# Altium PCB board.PcbDoc
Units mm, origin at the board's own origin, x right, y up, seen from the top; angles counter-clockwise.
Board outline 68.5 x 46.5 mm, 2 copper layers (Sig, GND), stack 1.671 mm thick; 46 components, 43 nets, 174 pads, 55 vias.
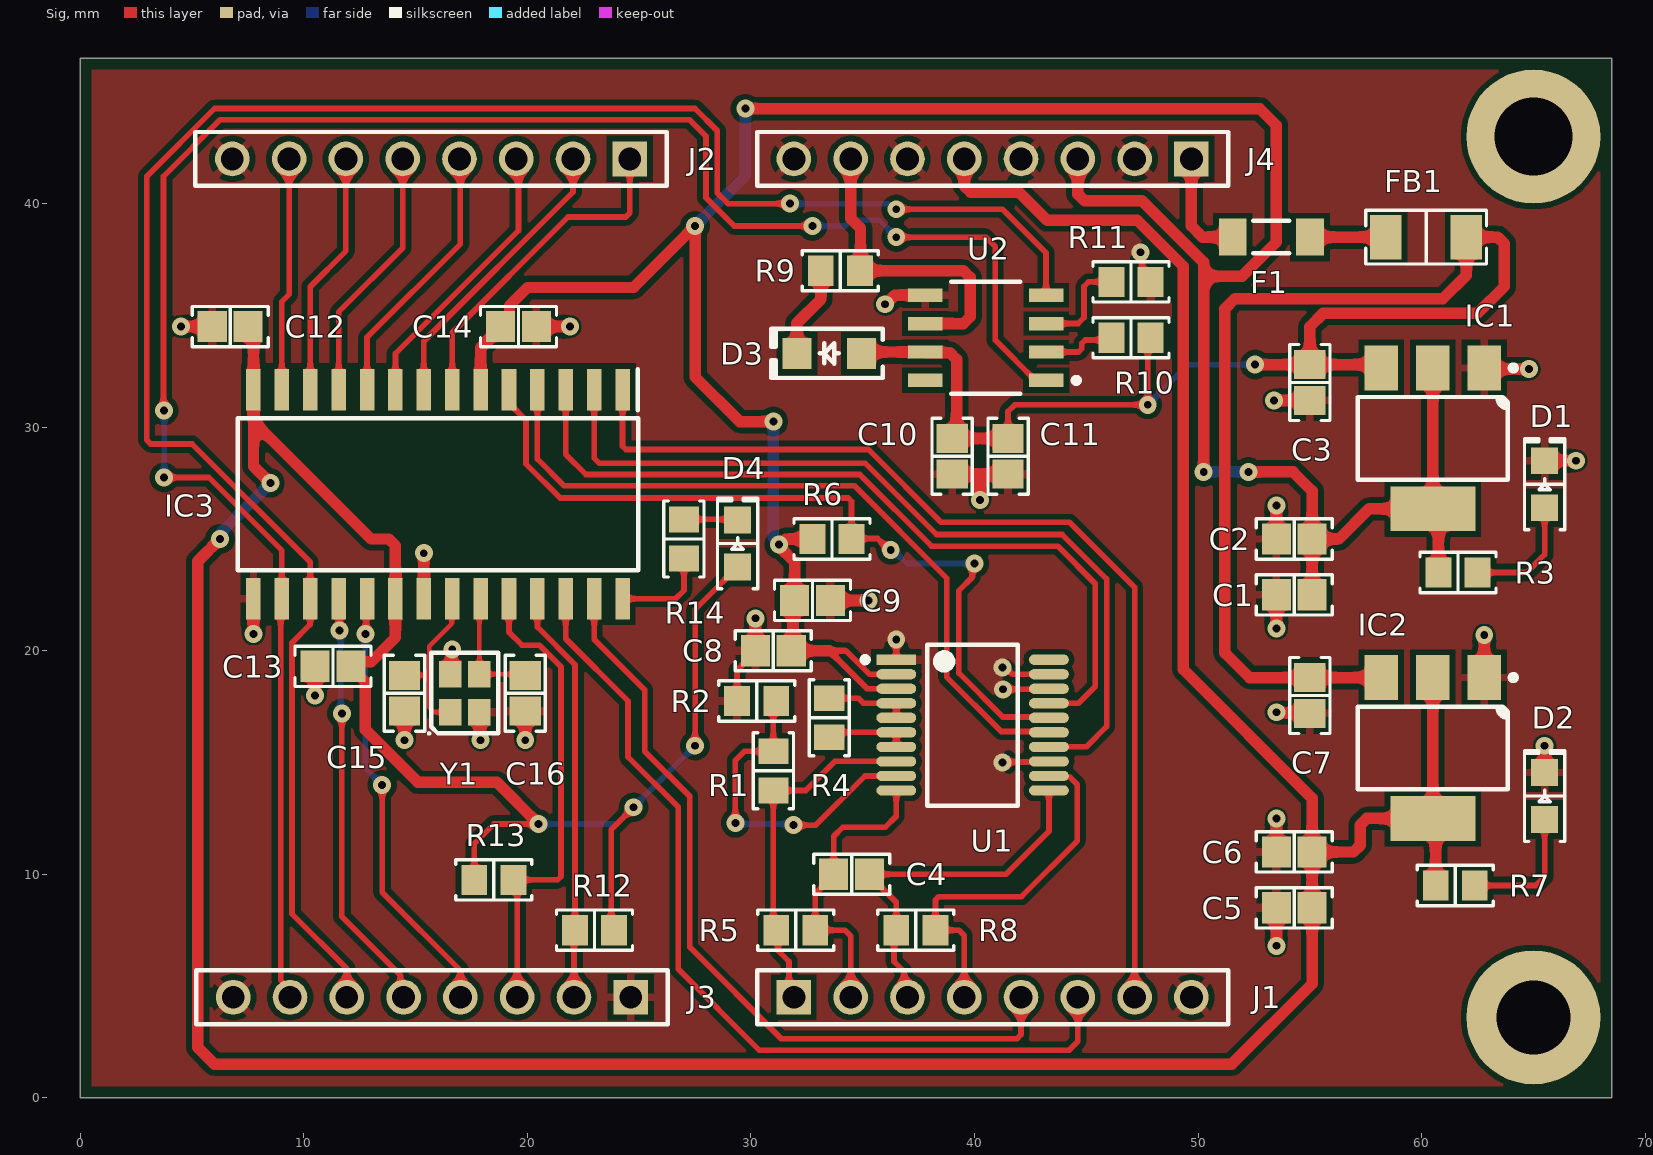
[diagram p0: Sig view]
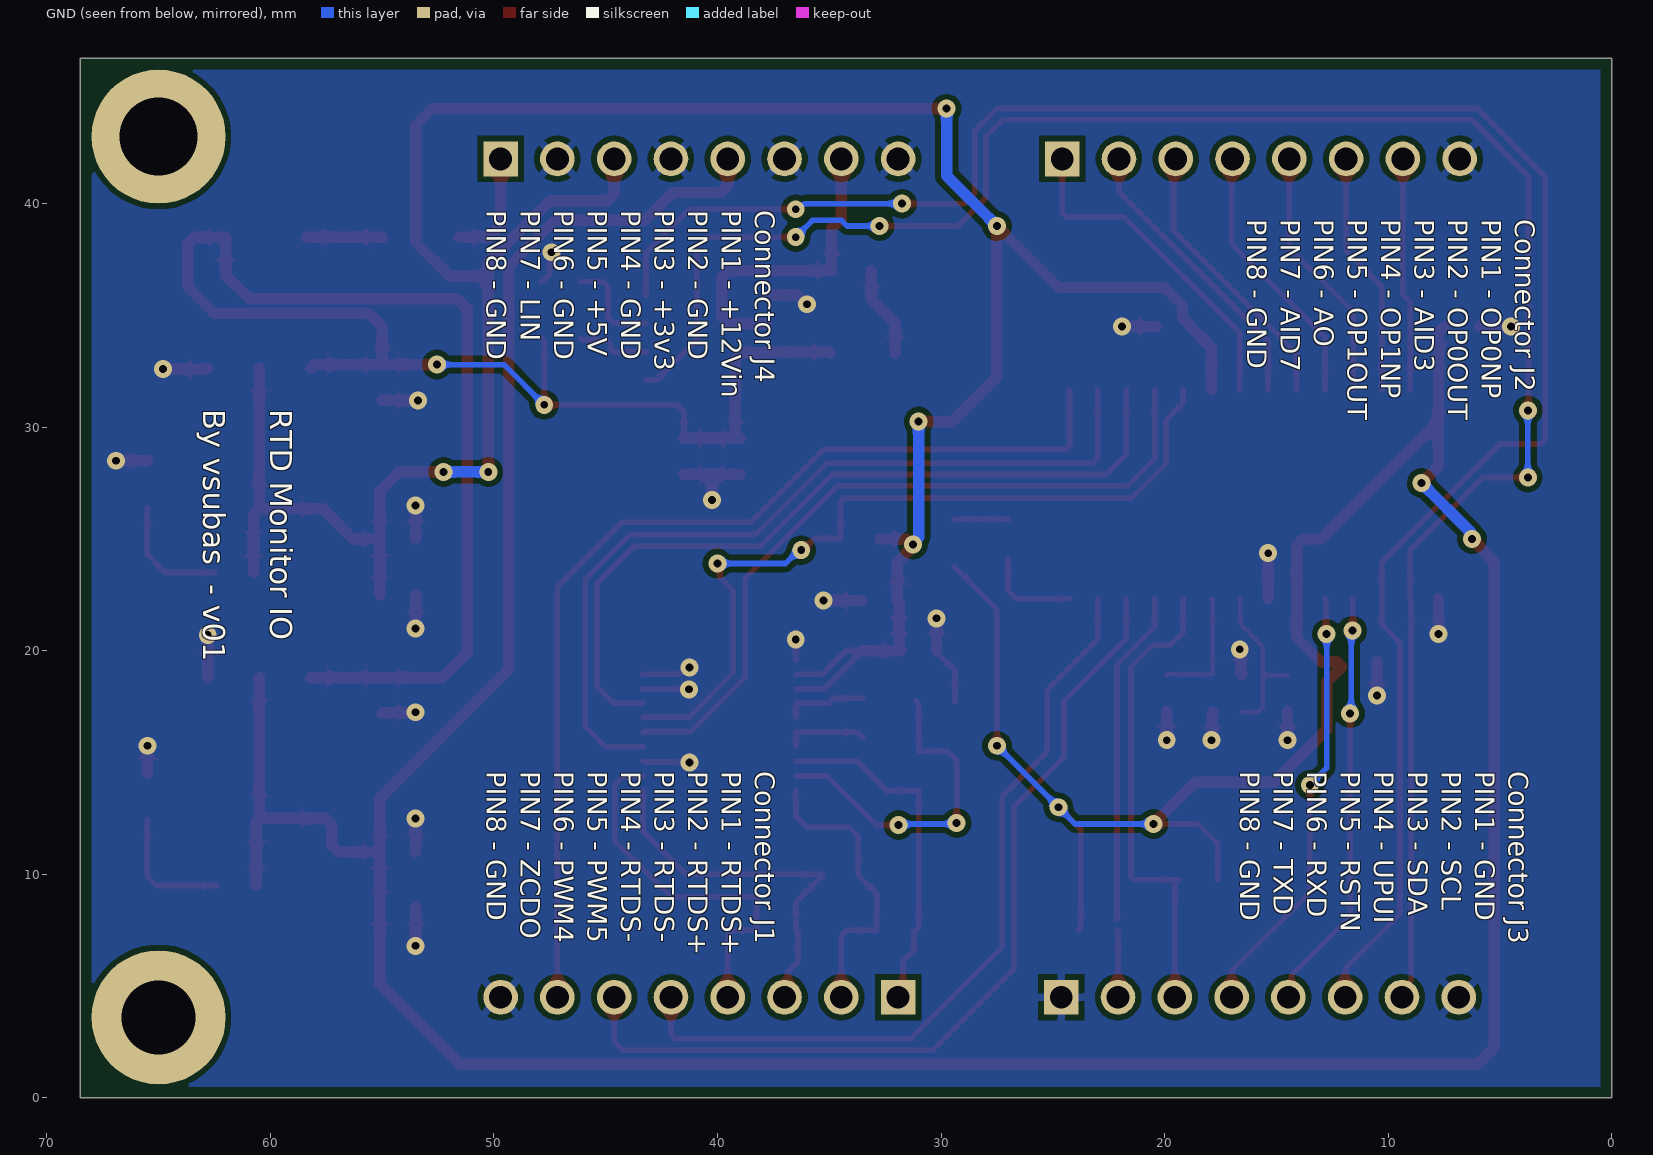
[diagram p1: GND view, seen from below]
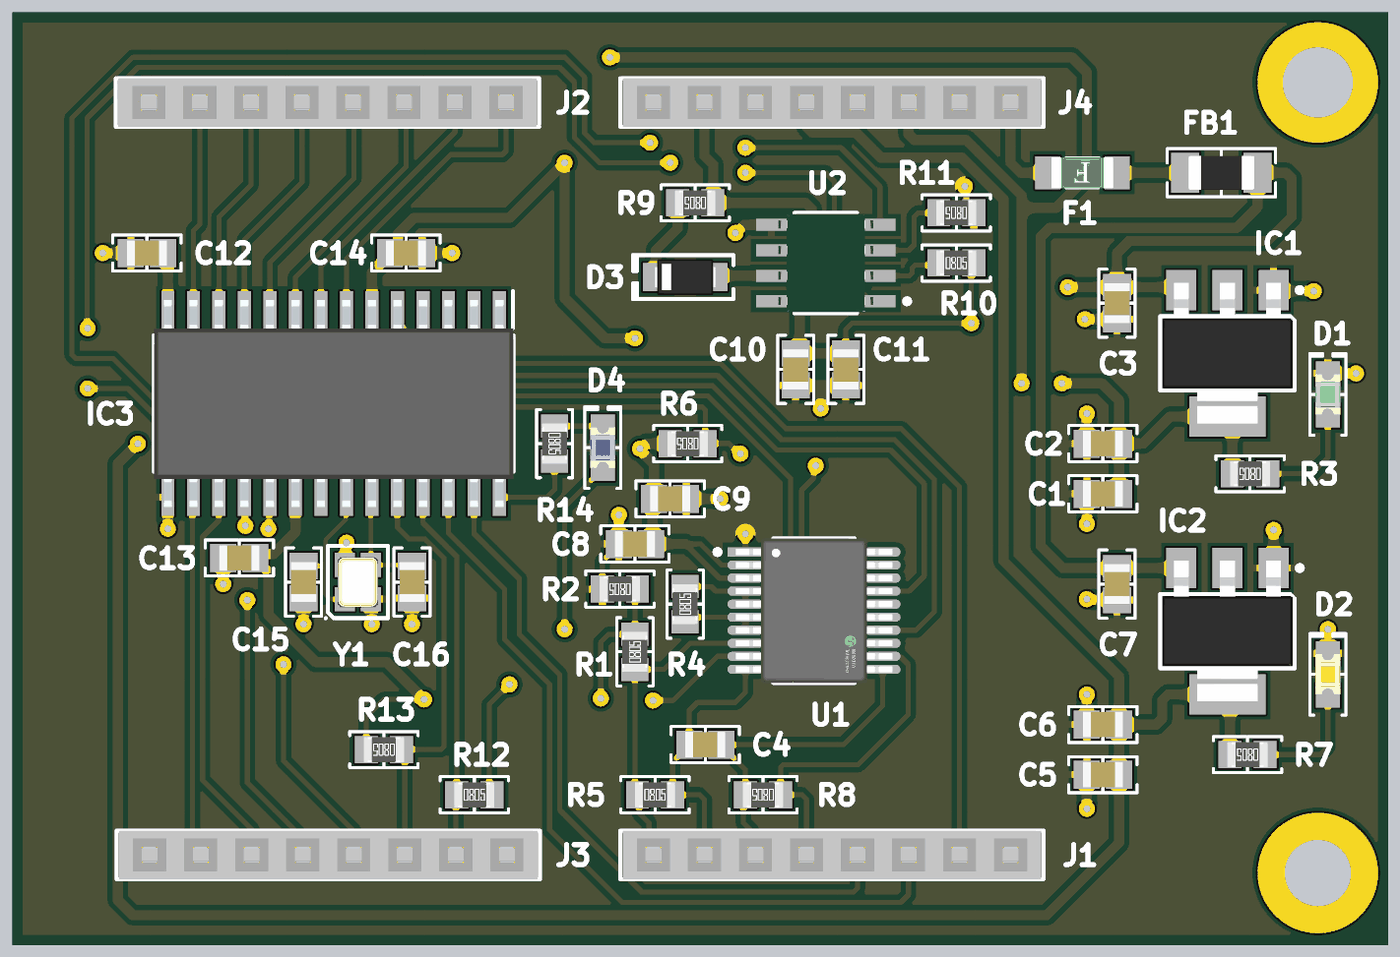
[diagram p2: 3D render of the assembled board from above, using the file's embedded part models]

## Layer stack, top to bottom
Top Solder: solder mask 0.0102, Solder Resist, Dk 3.5
Sig: signal copper 0.0356
Dielectric 1: dielectric 1.6, FR-4, Dk 4.8
GND: signal copper 0.0356
Bottom Solder: solder mask 0.0102, Solder Resist, Dk 3.5

## Board outline
0,0 0,46.5 68.5,46.5 68.5,0

## Design rules (kind name [scope] priority, off if disabled: settings)
BoardOutlineClearance [All] p1: gap=0.5 ignorepadtopadclearanceinfootprint=FALSE
Clearance [All] p1: gap=0.254 ignorepadtopadclearanceinfootprint=TRUE
HoleSize [All] p1: absolutevalues=TRUE maxlimit=5 minlimit=0.025 maxpercent=80.000 minpercent=20.000
MinimumSolderMaskSliver [All] p1: minsoldermaskwidth=0.01
PlaneConnect [All] p1: pad.planeconnectstyle=Relief pad.reliefexpansion=0.508 pad.reliefentries=4 pad.reliefconductorwidth=0.35 pad.reliefairgap=0.254 via.planeconnectstyle=Direct via.reliefexpansion=0.508 via.reliefentries=4 via.reliefconductorwidth=0.254 via.reliefairgap=0.254
PolygonConnect [All] p1: thpad.connectstyle=Relief thpad.reliefconductorwidth=0.35 thpad.reliefentries=4 thpad.polygonreliefangle="90 Angle" thpad.airgapwidth=0.254 thpad.conductorbypadedge=TRUE thpad.mindistance=0.381 thpad.enablemindistance=FALSE smdpad.connectstyle=Relief smdpad.reliefconductorwidth=0.35 smdpad.reliefentries=4 smdpad.polygonreliefangle="90 Angle" smdpad.airgapwidth=0.254 smdpad.conductorbypadedge=TRUE smdpad.mindistance=0.381 smdpad.enablemindistance=FALSE via.connectstyle=Direct via.reliefconductorwidth=0.254 via.reliefentries=4 via.polygonreliefangle="90 Angle" via.airgapwidth=0.254
RoutingVias [All] p1: holewidth=0.35 width=0.8 viastyle="Through Hole" minholewidth=0.35 minwidth=0.8 maxholewidth=0.35 maxwidth=0.8
SilkToSilkClearance [All] p1: silktosilkclearance=0.01
SilkToSolderMaskClearance [IsPad] p1: minsilkscreentomaskgap=0.01 clearancetoexposedcopper=TRUE
SolderMaskExpansion [All] p1: expansion=0.102 istentingtop=FALSE
Width [All] p1: maxlimit=0.508 minlimit=0.203 preferedwidth=0.254
25 further rules are at their usual default settings.

## Components (designator, comment, footprint, x,y, rotation, side; value= is the part's Value field where it differs from the comment)
C1 "0.1µF" "CAP 0805_2012" 54.3,22.5 r0 top
C2 "4.7µF" "CAP 0805_2012" 54.3,25 r0 top
C3 "2.2µF" "CAP 0805_2012" 55,32 r90 top
C4 "0.1µF" "CAP 0805_2012" 34.5,10 r0 top
C5 "0.1µF" "CAP 0805_2012" 54.3,8.5 r0 top
C6 "4.7µF" "CAP 0805_2012" 54.3,11 r0 top
C7 "2.2µF" "CAP 0805_2012" 55,18 r90 top
C8 "0.1µF" "CAP 0805_2012" 31,20 r0 top
C9 "0.1µF" "CAP 0805_2012" 32.75,22.25 r180 top
C10 "0.1µF" "CAP 0805_2012" 39,28.7 r90 top
C11 "2.2µF" "CAP 0805_2012" 41.5,28.7 r90 top
C12 "0.1µF" "CAP 0805_2012" 6.7,34.5 r0 top
C13 "0.1µF" "CAP 0805_2012" 11.3,19.3 r0 top
C14 "0.1µF" "CAP 0805_2012" 19.6,34.5 r180 top
C15 "15pF" "CAP 0805_2012" 14.5,18.1 r90 top
C16 "15pF" "CAP 0805_2012" 19.9,18.1 r90 top
D1 "Green" "LED 0805_2012 GREEN" 65.5,27.45 r90 top
D2 "Yellow" "LED 0805_2012 YELLOW" 65.5,13.5 r90 top
D3 "RSFAL R3G" "SMF DO-219AB" 33.5,33.3 r180 top
D4 "Blue" "LED 0805_2012 BLUE" 29.4,24.8 r90 top
F1 "MFU1206FF01250P100" "FUSE 1206_3216 0.6MM" 53.275,38.5 r180 top
FB1 "50 Ohms @ 100 MHz" "FER 1206_3216" 60.2,38.5 r180 top
IC1 "LD1117S33TR" "ST SOT-223" 60.5,29.5 r270 top
IC2 "LD1117S50TR" "ST SOT-223" 60.5,15.65 r270 top
IC3 "AVR128DB28-E_SO" SOIC127P1030X265-28N 16,27 r270 top
J1 "SSQ-108-01-F-S" SMTC-SSQ-108-01-X-S 31.92,4.5 r0 top
J2 "SSQ-108-01-F-S" SMTC-SSQ-108-01-X-S 24.58,42 r180 top
J3 "SSQ-108-01-F-S" SMTC-SSQ-108-01-X-S 24.62,4.5 r180 top
J4 "SSQ-108-01-F-S" SMTC-SSQ-108-01-X-S 49.7,42 r180 top
R1 "100M" "RES 0805_2012" 31,14.625 r90 top
R2 "0R" "RES 0805_2012" 30.25,17.75 r180 top
R3 "330R" "RES 0805_2012" 61.625,23.5 r180 top
R4 "470R" "RES 0805_2012" 33.5,17 r90 top
R5 "0R" "RES 0805_2012" 32,7.5 r0 top
R6 "10k" "RES 0805_2012" 33.625,25 r180 top
R7 "510R" "RES 0805_2012" 61.5,9.5 r180 top
R8 "0R" "RES 0805_2012" 37.375,7.5 r180 top
R9 "1k" "RES 0805_2012" 34,37 r180 top
R10 "10k" "RES 0805_2012" 47,34 r0 top
R11 "10k" "RES 0805_2012" 47,36.5 r180 top
R12 "1k" "RES 0805_2012" 23,7.5 r0 top
R13 "1k" "RES 0805_2012" 18.5,9.75 r180 top
R14 "510R" "RES 0805_2012" 27,25 r270 top
U1 "MAX31865AAP+" FP-A20-1-IPC_B 39.914,16.675 r0 top
U2 "MCP2003B-E/SN" FP-C04-057-MFG 40.5,34 r180 top
Y1 "16 MHz" "NDK NX2520SA" 17.2,18.1 r90 top

## Footprints (in the part's own frame and the unit in brackets; to place one, negate y for a bottom-side part, rotate by r counter-clockwise, add the part's x,y. Pads: shape width x height; smd on the part's side, far side on the other; paste and mask are expansions set on the pad)
"CAP 0805_2012" [mm] "Chip Capacitor, 2-Leads, Body 2.00x1.20mm, IPC Medium Density"
  rect 1.3x1.4 smd: 1(-0.8,0) 2(0.8,0)
  silkscreen extent -1.7,-0.9 1.7,0.9, body extent -1,-0.64 1,0.64, height 1.26
"FER 1206_3216" [mm] "Chip Ferrite, 2-Leads, Body 3.20x1.60mm, IPC Medium Density"
  rect 1.4x2 smd: 1(-1.8,0) 2(1.8,0)
  silkscreen extent -2.7,-1.2 2.7,1.2, body extent -1.65,-0.85 1.65,0.85, height 1.3
FP-A20-1-IPC_B [mm]
  rect 1.782x0.458 smd paste+0 mask+0: 1(-3.414,2.925)
  rrect100% 1.782x0.458 smd paste+0 mask+0: 2(-3.414,2.275) 3(-3.414,1.625) 4(-3.414,0.975) 5(-3.414,0.325) 6(-3.414,-0.325) 7(-3.414,-0.975) 8(-3.414,-1.625) 9(-3.414,-2.275) 10(-3.414,-2.925) 11(3.414,-2.925) 12(3.414,-2.275) 13(3.414,-1.625) 14(3.414,-0.975) 15(3.414,-0.325) 16(3.414,0.325) 17(3.414,0.975) 18(3.414,1.625) 19(3.414,2.275) 20(3.414,2.925)
  silkscreen extent -4.93,-3.6 2.02,3.6, body extent -4.55,-3.85 4.55,3.85, height 0.25
FP-C04-057-MFG [mm]
  rect 1.55x0.6 smd paste+0 mask+0: 1(-2.7,1.905) 2(-2.7,0.635) 3(-2.7,-0.635) 4(-2.7,-1.905) 5(2.7,-1.905) 6(2.7,-0.635) 7(2.7,0.635) 8(2.7,1.905)
  silkscreen extent -4.18,-2.5 1.55,2.5, body extent -3.57,-2.75 3.57,2.75, height 0.25
"FUSE 1206_3216 0.6MM" [mm] "Chip Fuse 1.5A AC 63V DC, 2-Leads, Body 3.10x1.55mm, IPC Medium Densitym"
  rect 1.25x1.65 smd: 1(-1.725,0) 2(1.725,0)
  silkscreen extent -0.8,-0.72 0.8,0.72, body extent -1.55,-0.77 1.55,0.78, height 0.76
"LED 0805_2012 BLUE" [mm] "Chip Diode, 2-Leads, Body 2.00x1.25mm, IPC Medium Density"
  rect 1.2x1.2 smd: 1(-1.05,0) 2(1.05,0)
  silkscreen extent -2.03,-0.9 2.03,0.9, body extent -1,-0.62 1,0.63, height 0.9
"LED 0805_2012 GREEN" [mm] "Chip Diode, 2-Leads, Body 2.00x1.25mm, IPC Medium Density"
  rect 1.2x1.2 smd: 1(-1.05,0) 2(1.05,0)
  silkscreen extent -2.03,-0.9 2.03,0.9, body extent -1,-0.62 1,0.63, height 0.9
"LED 0805_2012 YELLOW" [mm] "Chip Diode, 2-Leads, Body 2.00x1.25mm, IPC Medium Density"
  rect 1.2x1.2 smd: 1(-1.05,0) 2(1.05,0)
  silkscreen extent -2.03,-0.9 2.03,0.9, body extent -1,-0.62 1,0.63, height 0.9
"NDK NX2520SA" [mm] "Crystal, 4-Leads, Body 2.00x2.50mm, Pitch 1.70mm, IPC Medium Density"
  rect 1.2x1 smd: 1(-0.85,0.65) 2(-0.85,-0.65) 3(0.85,-0.65) 4(0.85,0.65)
  silkscreen extent -1.85,-1.5 1.8,1.65, body extent -1.26,-1.01 1.26,1.01, height 0.5
"RES 0805_2012" [mm] "Chip Resistor, 2-Leads, Body 2.00x1.25mm, IPC Medium Density"
  rect 1.15x1.35 smd: 1(-0.875,0) 2(0.875,0)
  silkscreen extent -1.7,-0.9 1.7,0.9, body extent -1,-0.62 1,0.63, height 0.6
"SMF DO-219AB" [mm] "Molded Diode, 2-Leads, Body 3.90x1.90mm, IPC Medium Density"
  rect 1.3x1.4 smd: 1(-1.45,0) 2(1.45,0)
  silkscreen extent -2.4,-1.1 2.59,1.1, body extent -1.5,-0.9 1.5,0.9, height 1.18
SMTC-SSQ-108-01-X-S [mm] "SQ Post Socket, 1x8 Pins, Vertical, 2.54mm Pitch, Female"
  rect 1.55x1.55 hole 1.02: 1(0,0)
  round 1.55 hole 1.02: 2(2.54,0) 3(5.08,0) 4(7.62,0) 5(10.16,0) 6(12.7,0) 7(15.24,0) 8(17.78,0)
  silkscreen extent -1.65,-1.2 19.43,1.2, body extent -1.52,-1.21 19.3,1.21, height 8.51
SOIC127P1030X265-28N [mm]
  rect 1.85x0.65 smd: 1(-4.675,8.255) 2(-4.675,6.985) 3(-4.675,5.715) 4(-4.675,4.445) 5(-4.675,3.175) 6(-4.675,1.905) 7(-4.675,0.635) 8(-4.675,-0.635) 9(-4.675,-1.905) 10(-4.675,-3.175) 11(-4.675,-4.445) 12(-4.675,-5.715) 13(-4.675,-6.985) 14(-4.675,-8.255) 15(4.675,-8.255) 16(4.675,-6.985) 17(4.675,-5.715) 18(4.675,-4.445) 19(4.675,-3.175) 20(4.675,-1.905) 21(4.675,-0.635) 22(4.675,0.635) 23(4.675,1.905) 24(4.675,3.175) 25(4.675,4.445) 26(4.675,5.715) 27(4.675,6.985) 28(4.675,8.255)
  silkscreen extent -5.6,-8.95 3.4,8.95, body extent -5.15,-8.95 5.15,8.95, height 2.65
"ST SOT-223" [mm] "SOT223, 4-Leads, Body 6.50x7.00mm (avg), Pitch 2.30mm, IPC Medium Density"
  rect 2x1.5 smd: 1(-3.15,2.3) 2(-3.15,0) 3(-3.15,-2.3)
  rect 2x3.8 smd: 4(3.15,0)
  silkscreen extent -3.27,-3.35 1.85,3.73, body extent -3.52,-3.25 3.5,3.25, height 1.8

## Part data
C1 C4 C5 C8 C9 C10 C12 C13 C14: library part 08053C104JAT4A, "CAP CER 0.1UF 25V X7R 0805", Device Package="0805 (2012 Metric)", manufacturer="AVX Corporation", Operating Temperature="-55°C ~ 125°C", Supplier Part Number 1=478-13051-1-ND, Temperature Coefficient=X7R, Tolerance=±5%, Voltage - Rated=25V, Applications="General Purpose", Capacitance=0.1µF, componentlink1description=Datasheet, componentlink1url=http://datasheets.avx.com/X7RDielectric.pdf, componentlink2description="DigiKey Link", componentlink2url=http://digikey.com/product-detail/en/avx-corporation/08053C104JAT4A/478-13051-1-ND/9948569, lastupdated="2/09/2020 1:04:39 AM", Lifecycle Status=Active, Minimum Order=1, Mounting Type="Surface Mount, MLCC", Package / Case="0805 (2012 Metric)", packaging=TapeAndReel, Part Number=08053C104JAT4A, Part Status=Active, partid=3721, price=0.04, series=-, Size / Dimension="0.079\" L x 0.049\" W (2.01mm x 1.25mm)", Supplier 1=DigiKey, Thickness (Max)="0.037\" (0.94mm)"
C2 C6: library part CL21A475KBQNNNE, "CAP CER 4.7UF 50V X5R 0805", Device Package="0805 (2012 Metric)", manufacturer="Samsung Electro-Mechanics", Operating Temperature="-55°C ~ 85°C", Supplier Part Number 1=1276-1248-1-ND, Temperature Coefficient=X5R, Tolerance=±10%, Voltage - Rated=50V, Applications="General Purpose", Capacitance=4.7µF, componentlink1description=Datasheet, componentlink1url=http://www.samsungsem.com/kr/support/product-search/mlcc/CL21A475KBQNNNE.jsp, componentlink2description="DigiKey Link", componentlink2url=https://www.digikey.com/en/products/detail/samsung-electro-mechanics/CL21A475KBQNNNE/3886906, lastupdated="21/03/2023 7:12:38 PM", Lifecycle Status=Active, Minimum Order=1, Mounting Type="Surface Mount, MLCC", Package / Case="0805 (2012 Metric)", packaging=TapeAndReel, Part Number=CL21A475KBQNNNE, Part Status=Active, partid=3027, price=0.03, series=CL, Size / Dimension="0.079\" L x 0.049\" W (2.00mm x 1.25mm)", Supplier 1=DigiKey, Thickness (Max)="0.055\" (1.40mm)"
C3 C7 C11: library part CL21A225KB9LNNC, "CAP CER 2.2UF 50V X5R 0805", Device Package="0805 (2012 Metric)", manufacturer="Samsung Electro-Mechanics", Operating Temperature="-55°C ~ 85°C", Supplier Part Number 1=1276-2409-1-ND, Temperature Coefficient=X5R, Tolerance=±10%, Voltage - Rated=50V, Applications="General Purpose", Capacitance=2.2µF, componentlink1description=Datasheet, componentlink1url=http://www.samsungsem.com/kr/support/product-search/mlcc/CL21A225KB9LNNC.jsp, componentlink2description="DigiKey Link", componentlink2url=https://www.digikey.com/en/products/detail/samsung-electro-mechanics/CL21A225KB9LNNC/3888067, Features="Low Profile", lastupdated="21/03/2023 7:12:38 PM", Lifecycle Status=Active, Minimum Order=1, Mounting Type="Surface Mount, MLCC", Package / Case="0805 (2012 Metric)", packaging=TapeAndReel, Part Number=CL21A225KB9LNNC, Part Status=Active, partid=3097, price=0.04, series=CL, Size / Dimension="0.079\" L x 0.049\" W (2.00mm x 1.25mm)", Supplier 1=DigiKey, Thickness (Max)="0.039\" (1.00mm)"
C15 C16: library part 08055A150GAT2A, "CAP CER 15PF 50V NP0 0805", Device Package="0805 (2012 Metric)", manufacturer="AVX Corporation", Operating Temperature="-55°C ~ 125°C", Supplier Part Number 1=478-11884-1-ND, Temperature Coefficient="C0G, NP0", Tolerance=±2%, Voltage - Rated=50V, Applications="General Purpose", Capacitance=15pF, componentlink1description=Datasheet, componentlink1url=http://datasheets.avx.com/C0GNP0-Dielectric.pdf, componentlink2description="DigiKey Link", componentlink2url=http://digikey.com/product-detail/en/avx-corporation/08055A150GAT2A/478-11884-1-ND/8573520, lastupdated="2/09/2020 1:04:39 AM", Lifecycle Status=Active, Minimum Order=1, Mounting Type="Surface Mount, MLCC", Package / Case="0805 (2012 Metric)", packaging=TapeAndReel, Part Number=08055A150GAT2A, Part Status=Active, partid=3968, price=0.10, series=-, Size / Dimension="0.079\" L x 0.049\" W (2.01mm x 1.25mm)", Supplier 1=DigiKey, Thickness (Max)="0.037\" (0.94mm)"
D1: library part QTLP630C4TR, "LED GREEN CLEAR 0805 SMD", Current - Test=20mA, Device Package="0805 (2012 Metric)", Lens Color=Colorless, manufacturer="Everlight Electronics Co Ltd", Millicandela Rating=10mcd, Supplier Device Package=0805, Supplier Part Number 1=1080-1411-1-ND, Voltage - Forward (Vf) (Typ)=2.1V, Color=Green, componentlink1description=Datasheet, componentlink1url=//media.digikey.com/PDF/Data%20Sheets/Everlight%20PDFs/QTLP630-2.pdf, componentlink2description="DigiKey Link", componentlink2url=https://www.digikey.com/en/products/detail/everlight-electronics-co-ltd/QTLP630C4TR/2675902, Configuration=Standard, Height (Max)=1.20mm, lastupdated="7/04/2023 8:00:35 PM", Lens Size="1.40mm x 1.25mm", Lens Style="Rectangle with Flat Top", Lens Transparency=Clear, Lifecycle Status=Active, Minimum Order=1, Mounting Type="Surface Mount", Package / Case="0805 (2012 Metric)", packaging=TapeAndReel, Part Number=QTLP630C4TR, Part Status=Active, partid=240, price=0.04, series=-, Size / Dimension="2.00mm L x 1.25mm W", Supplier 1=DigiKey, Viewing Angle=140°, Wavelength - Dominant=570nm, Wavelength - Peak=565nm
D2: library part VAOL-S8YP4, "LED YELLOW CLEAR 0805 SMD", Current - Test=20mA, Device Package="0805 (2012 Metric)", Lens Color=Colorless, manufacturer="Visual Communications Company - VCC", Millicandela Rating=92mcd, Supplier Device Package=0805, Supplier Part Number 1=VAOL-S8YP4CT-ND, Voltage - Forward (Vf) (Typ)=2V, Color=Yellow, componentlink1description=Datasheet, componentlink1url=http://vcclite.com/_pdf/VAOL-S8YP4-LED-0805-yellow.pdf, componentlink2description="DigiKey Link", componentlink2url=http://digikey.com/product-detail/en/visual-communications-company-vcc/VAOL-S8YP4/VAOL-S8YP4CT-ND/5176155, Configuration=Standard, Height (Max)=1.30mm, lastupdated="21/03/2023 8:00:35 PM", Lens Size="1.40mm x 1.25mm", Lens Style="Rectangle with Flat Top", Lens Transparency=Clear, Lifecycle Status=Active, Minimum Order=1, Mounting Type="Surface Mount", Package / Case="0805 (2012 Metric)", packaging=TapeAndReel, Part Number=VAOL-S8YP4, Part Status=Active, partid=40, price=0.08, series=-, Size / Dimension="2.00mm L x 1.25mm W", Supplier 1=DigiKey, Viewing Angle=140°, Wavelength - Dominant=589nm, Wavelength - Peak=591nm
D3: "DIODE GEN PURP 50V 500MA SUB SMA", Capacitance @ Vr, F="4pF @ 4V, 1MHz", Current - Average Rectified (Io)=500mA, Current - Reverse Leakage @ Vr="5µA @ 50V", manufacturer="Taiwan Semiconductor Corporation", Operating Temperature - Junction="-55°C ~ 150°C", Package / Case=DO-219AB, Supplier Device Package="Sub SMA", Supplier Part Number 1=RSFALR3GCT-ND, Voltage - DC Reverse (Vr) (Max)=50V, Voltage - Forward (Vf) (Max) @ If="1.3V @ 500mA", componentlink1description=Datasheet, componentlink1url=https://www.taiwansemi.com/products/datasheet/RSFAL%20SERIES_L15.pdf, componentlink2description="DigiKey Link", componentlink2url=http://digikey.com/product-detail/en/taiwan-semiconductor-corporation/RSFAL-R3G/RSFALR3GCT-ND/7358188, Diode Type=Standard, lastupdated="11/04/2023 8:03:34 PM", Lifecycle Status=Active, Minimum Order=1, Mounting Type="Surface Mount", packaging=TapeAndReel, Part Number="RSFAL R3G", Part Status=Active, partid=1240, price=0.07, Reverse Recovery Time (trr)=150ns, series=-, Speed="Fast Recovery =< 500ns, > 200mA (Io)", Supplier 1=DigiKey
D4: library part 5973605607F, "LED BLUE 0805 SMD", Current - Test=2mA, Device Package="0805 (2012 Metric)", Lens Color=0.93mm, manufacturer=Dialight, Millicandela Rating=15mcd, Supplier Device Package=0805, Supplier Part Number 1=350-4394-1-ND, Voltage - Forward (Vf) (Typ)=2.8V, Color=Blue, componentlink1description=Datasheet, componentlink1url=http://www.dialightsignalsandcomponents.com/Assets/Drawings/2D_Drawings_DrawingDetailedSpec/NewDrawings/18375A.pdf, componentlink2description="DigiKey Link", componentlink2url=https://www.digikey.com/en/products/detail/dialight/5973605607F/9385449, Configuration=Standard, Height (Max)=1.10mm, lastupdated="8/04/2023 8:00:14 PM", Lens Size="1.40mm x 1.25mm", Lens Style="Rectangle with Flat Top", Lifecycle Status=Active, Minimum Order=1, Mounting Type="Surface Mount", Package / Case="0805 (2012 Metric)", packaging=TapeAndReel, Part Number=5973605607F, Part Status=Active, partid=760, price=0.08, series=597, Size / Dimension="2.00mm L x 1.25mm W", Supplier 1=DigiKey, Viewing Angle=130°, Wavelength - Peak=468nm
F1: "FUSE BOARD MNT 1.25A 63VDC 1206", Breaking Capacity @ Rated Voltage=50A, Current Rating (Amps)=1.25A, Device Package="1206 (3216 Metric)", manufacturer="Vishay Beyschlag", Operating Temperature="-55°C ~ 125°C", Supplier Part Number 1=MFU12061.25CT-ND, Voltage Rating - DC=63V, Approval Agency=UL, Approvals=UL, componentlink1description=Datasheet, componentlink1url=http://www.vishay.com/docs/28747/mfuserie.pdf, componentlink2description="DigiKey Link", componentlink2url=http://digikey.com/product-detail/en/vishay-beyschlag/MFU1206FF01250P100/MFU12061.25CT-ND/1206562, Fuse Type="Board Mount (Cartridge Style Excluded)", lastupdated="2/09/2020 1:30:46 AM", Lifecycle Status=Active, Melting I²t=0.0041, Minimum Order=1, Mounting Type="Surface Mount", Package / Case="1206 (3216 Metric)", packaging=TapeAndReel, Part Number=MFU1206FF01250P100, Part Status=Active, price=0.30, Response Time="Fast Blow", series=MFU, Size / Dimension="0.126\" L x 0.063\" W x 0.022\" H (3.20mm x 1.60mm x 0.55mm)", Supplier 1=DigiKey
FB1: library part MFBW1V3216-500-R, "FERRITE BEAD 50 OHM 1206 1LN", Current Rating (Max)=3A, DC Resistance (DCR) (Max)=70mOhm, Device Package="1206 (3216 Metric)", manufacturer="Eaton - Electronics Division", Operating Temperature="-40°C ~ 85°C", Supplier Part Number 1=283-MFBW1V3216-500-RCT-ND, componentlink1description=Datasheet, componentlink1url=https://www.eaton.com/content/dam/eaton/products/electronic-components/resources/data-sheet/eaton-mfbw1v3216-high-impedance-multilayer-ferrite-chip-bead-data-sheet.pdf, componentlink2description="DigiKey Link", componentlink2url=https://www.digikey.com/en/products/detail/eaton-electronics-division/MFBW1V3216-500-R/13161315, Height (Max)="0.043\" (1.10mm)", Impedance @ Frequency="50 Ohms @ 100 MHz", lastupdated="7/04/2023 7:54:11 PM", Lifecycle Status=Active, Minimum Order=1, Mounting Type="Surface Mount", Number of Lines=1, Package / Case="1206 (3216 Metric)", packaging=TapeAndReel, Part Number=MFBW1V3216-500-R, Part Status=Active, partid=3259, price=0.03, series=MFBW1V3216, Size / Dimension="0.126\" L x 0.063\" W (3.20mm x 1.60mm)", Supplier 1=DigiKey
IC1: "IC REG LINEAR 3.3V 800MA SOT223", Current - Output=800mA, Current - Quiescent (Iq)="10 mA", manufacturer=STMicroelectronics, Operating Temperature="0°C ~ 125°C", Package / Case="TO-261-4, TO-261AA", Supplier Device Package=SOT-223, Supplier Part Number 1=497-1242-1-ND, Voltage - Input (Max)=15V, Voltage - Output (Min/Fixed)=3.3V, Voltage Dropout (Max)="1.2V @ 800mA", componentlink1description=Datasheet, componentlink1url=http://www.st.com/content/ccc/resource/technical/document/datasheet/99/3b/7d/91/91/51/4b/be/CD00000544.pdf/files/CD00000544.pdf/jcr:content/translations/en.CD00000544.pdf, componentlink2description="DigiKey Link", componentlink2url=https://www.digikey.com/en/products/detail/stmicroelectronics/LD1117S33TR/585766, lastupdated="7/04/2023 8:08:42 PM", Lifecycle Status=Active, Minimum Order=1, Mounting Type="Surface Mount", Number of Regulators=1, Output Configuration=Positive, Output Type=Fixed, packaging=TapeAndReel, Part Number=LD1117S33TR, Part Status=Active, price=0.21, Protection Features="Over Current, Over Temperature", PSRR="75dB (120Hz)", series=-, Supplier 1=DigiKey
IC2: "IC REG LINEAR 5V 800MA SOT223", Current - Output=800mA, Current - Quiescent (Iq)="10 mA", manufacturer=STMicroelectronics, Operating Temperature="0°C ~ 125°C", Package / Case="TO-261-4, TO-261AA", Supplier Device Package=SOT-223, Supplier Part Number 1=497-6447-1-ND, Voltage - Input (Max)=15V, Voltage - Output (Min/Fixed)=5V, Voltage Dropout (Max)="1.2V @ 800mA", componentlink1description=Datasheet, componentlink1url=http://www.st.com/content/ccc/resource/technical/document/datasheet/99/3b/7d/91/91/51/4b/be/CD00000544.pdf/files/CD00000544.pdf/jcr:content/translations/en.CD00000544.pdf, componentlink2description="DigiKey Link", componentlink2url=https://www.digikey.com/en/products/detail/stmicroelectronics/LD1117S50TR/1038360, lastupdated="7/04/2023 8:08:42 PM", Lifecycle Status=Active, Minimum Order=1, Mounting Type="Surface Mount", Number of Regulators=1, Output Configuration=Positive, Output Type=Fixed, packaging=TapeAndReel, Part Number=LD1117S50TR, Part Status=Active, price=0.21, Protection Features="Over Current, Over Temperature", PSRR="75dB (120Hz)", series=-, Supplier 1=DigiKey
IC3: "Integrated Circuit", Manufacturer_Name=Microchip, Manufacturer_Part_Number=AVR128DB28-E/SO, Mouser Part Number=579-AVR128DB28-E/SO, Datasheet Link=https://www.mouser.com/catalog/specsheets/mchp-s-a0011111973-1.pdf, Height=2.65mm, Mouser Price/Stock=https://www.mouser.co.uk/ProductDetail/Microchip-Technology-Atmel/AVR128DB28-E-SO?qs=vmHwEFxEFR%252BlBMYhZgyarQ%3D%3D
J1 J2 J3 J4: library part CMP-1023-00294-1, "SQ Post Socket, Through-hole, Vertical, -55 to 125 degC, 2.54 mm Pitch, 8-Pin, Female, RoHS", manufacturer=Samtec, Temperature Range="-55 to 125 degC", componentlink1description="Manufacturer URL", componentlink1url=http://www.samtec.com, componentlink2description=Datasheet, componentlink2url=http://www.samtec.com/documents/webfiles/pdf/SSQ_TH.PDF, ComponentLink3Description="Package Specification", ComponentLink3URL=http://www.samtec.com/documents/webfiles/cpdf/SSQ-1XX-XX-XXX-X-XX-XXX-XX-X-MKT.pdf, DatasheetVersion=F-214, Mounting Technology=Through-hole, Orientation=Vertical, PackageDescription="Assembly, Socket Strip .025[0.64] SQ Tail", PackageReference=SSQ-108-01-X-S, PackageVersion="BD, 6/1987", PartNumber=SSQ-108-01-F-S, Pitch="2.54 mm", RoHS=True
R1: library part HVCB0805FDC100M, "RES 100M OHM 1% 1/5W 0805", Device Package="0805 (2012 Metric)", manufacturer="Stackpole Electronics Inc", Operating Temperature="-55°C ~ 150°C", Power (Watts)="0.2W, 1/5W", Supplier Device Package=0805, Supplier Part Number 1=HVCB0805FDC100MCT-ND, Temperature Coefficient=±50ppm/°C, Tolerance=±1%, componentlink1description=Datasheet, componentlink1url=https://www.seielect.com/catalog/sei-hvc.pdf, componentlink2description="DigiKey Link", componentlink2url=https://www.digikey.com/en/products/detail/stackpole-electronics-inc/HVCB0805FDC100M/4696447, Composition="Thick Film", Features="High Voltage, Moisture Resistant, Pulse Withstanding", Height - Seated (Max)="0.025\" (0.64mm)", lastupdated="29/03/2023 7:43:09 PM", Lifecycle Status=Active, Minimum Order=1, Number of Terminations=2, Package / Case="0805 (2012 Metric)", packaging=TapeAndReel, Part Number=HVCB0805FDC100M, Part Status=Active, partid=34607, price=2.45, Resistance=100M, series=HVC, Size / Dimension="0.079\" L x 0.050\" W (2.01mm x 1.27mm)", Supplier 1=DigiKey
R2 R5 R8: library part TLRZ2ATTD, "RES 0 OHM JUMPER 0805", Device Package="0805 (2012 Metric)", manufacturer="KOA Speer Electronics, Inc.", Operating Temperature="-55°C ~ 170°C", Ratings=AEC-Q200, Supplier Device Package=0805, Supplier Part Number 1=2019-TLRZ2ATTDCT-ND, Tolerance=Jumper, componentlink1description=Datasheet, componentlink1url=http://www.koaspeer.com/catimages/Products/TLRZ/TLRZ.pdf, componentlink2description="DigiKey Link", componentlink2url=https://www.digikey.com/en/products/detail/koa-speer-electronics-inc/TLRZ2ATTD/9845494, Composition="Metal Element", Features="Automotive AEC-Q200, Current Sense", Height - Seated (Max)="0.022\" (0.55mm)", lastupdated="29/03/2023 7:43:37 PM", Lifecycle Status=Active, Minimum Order=1, Number of Terminations=2, Package / Case="0805 (2012 Metric)", packaging=TapeAndReel, Part Number=TLRZ2ATTD, Part Status=Active, partid=27685, price=0.08, Resistance=0R, series=TLRZ, Size / Dimension="0.079\" L x 0.049\" W (2.00mm x 1.25mm)", Supplier 1=DigiKey
R3: library part CRCW0805330RFKEAHP, "RES SMD 330 OHM 1% 1/2W 0805", Device Package="0805 (2012 Metric)", manufacturer="Vishay Dale", Operating Temperature="-55°C ~ 155°C", Power (Watts)="0.5W, 1/2W", Ratings=AEC-Q200, Supplier Device Package=0805, Supplier Part Number 1=541-330TCT-ND, Temperature Coefficient=±100ppm/°C, Tolerance=±1%, componentlink1description=Datasheet, componentlink1url=http://www.vishay.com/docs/20043/crcwhpe3.pdf, componentlink2description="DigiKey Link", componentlink2url=https://www.digikey.com/en/products/detail/vishay-dale/CRCW0805330RFKEAHP/2226912, Composition="Thick Film", Features="Automotive AEC-Q200, Pulse Withstanding", Height - Seated (Max)="0.020\" (0.50mm)", lastupdated="7/04/2023 7:45:00 PM", Lifecycle Status=Active, Minimum Order=1, Number of Terminations=2, Package / Case="0805 (2012 Metric)", packaging=TapeAndReel, Part Number=CRCW0805330RFKEAHP, Part Status=Active, partid=30364, price=0.03, Resistance=330R, series=CRCW-HP, Size / Dimension="0.079\" L x 0.049\" W (2.00mm x 1.25mm)", Supplier 1=DigiKey
R4: library part ERJ-PB6B4700V, "RES SMD 470 OHM 0.1% 1/4W 0805", Device Package="0805 (2012 Metric)", manufacturer="Panasonic Electronic Components", Operating Temperature="-55°C ~ 155°C", Power (Watts)="0.25W, 1/4W", Ratings=AEC-Q200, Supplier Device Package=0805, Supplier Part Number 1=P20556CT-ND, Temperature Coefficient=±50ppm/°C, Tolerance=±0.1%, componentlink1description=Datasheet, componentlink1url=https://industrial.panasonic.com/cdbs/www-data/pdf/RDM0000/AOA0000C328.pdf, componentlink2description="DigiKey Link", componentlink2url=https://www.digikey.com/en/products/detail/panasonic-electronic-components/ERJ-PB6B4700V/6213339, Composition="Thick Film", Features="Automotive AEC-Q200, Pulse Withstanding", Height - Seated (Max)="0.028\" (0.70mm)", lastupdated="29/03/2023 7:43:34 PM", Lifecycle Status=Active, Minimum Order=1, Number of Terminations=2, Package / Case="0805 (2012 Metric)", packaging=TapeAndReel, Part Number=ERJ-PB6B4700V, Part Status=Active, partid=28402, price=0.04, Resistance=470R, series=ERJ-PB6, Size / Dimension="0.079\" L x 0.049\" W (2.00mm x 1.25mm)", Supplier 1=DigiKey
R6 R10 R11: library part RNCS0805BKE10K0, "RES 10K OHM 0.1% 1/10W 0805", Device Package="0805 (2012 Metric)", manufacturer="Stackpole Electronics Inc", Operating Temperature="-55°C ~ 155°C", Power (Watts)="0.1W, 1/10W", Ratings=AEC-Q200, Supplier Device Package=0805, Supplier Part Number 1=RNCS0805BKE10K0CT-ND, Temperature Coefficient=±25ppm/°C, Tolerance=±0.1%, componentlink1description=Datasheet, componentlink1url=https://www.seielect.com/catalog/sei-rncs_rnch.pdf, componentlink2description="DigiKey Link", componentlink2url=https://www.digikey.com/en/products/detail/stackpole-electronics-inc/RNCS0805BKE10K0/1800067, Composition="Thin Film", Features="Anti-Corrosive, Automotive AEC-Q200, Moisture Resistant", Height - Seated (Max)="0.026\" (0.65mm)", Lifecycle Status=Active, Minimum Order=1, Number of Terminations=2, Package / Case="0805 (2012 Metric)", packaging=TapeAndReel, Part Number=RNCS0805BKE10K0, Part Status=Active, partid=27713, Resistance=10k, series=RNCS, Size / Dimension="0.079\" L x 0.049\" W (2.00mm x 1.25mm)", Supplier 1=DigiKey
  R6: lastupdated="29/03/2023 7:43:37 PM", price=0.09
  R10 R11: lastupdated="23/04/2023 7:51:08 PM", price=0.07
R7 R14: library part ERJ-6ENF5100V, "RES SMD 510 OHM 1% 1/8W 0805", Device Package="0805 (2012 Metric)", manufacturer="Panasonic Electronic Components", Operating Temperature="-55°C ~ 155°C", Power (Watts)="0.125W, 1/8W", Ratings=AEC-Q200, Supplier Device Package=0805, Supplier Part Number 1=P510CCT-ND, Temperature Coefficient=±100ppm/°C, Tolerance=±1%, componentlink1description=Datasheet, componentlink1url=https://industrial.panasonic.com/cdbs/www-data/pdf/RDA0000/AOA0000C304.pdf, componentlink2description="DigiKey Link", componentlink2url=https://www.digikey.com/en/products/detail/panasonic-electronic-components/ERJ-6ENF5100V/1746512, Composition="Thick Film", Features="Automotive AEC-Q200", Height - Seated (Max)="0.028\" (0.70mm)", lastupdated="7/04/2023 7:45:01 PM", Lifecycle Status=Active, Minimum Order=1, Number of Terminations=2, Package / Case="0805 (2012 Metric)", packaging=TapeAndReel, Part Number=ERJ-6ENF5100V, Part Status=Active, partid=30157, price=0.01, Resistance=510R, series=ERJ-6EN, Size / Dimension="0.079\" L x 0.049\" W (2.00mm x 1.25mm)", Supplier 1=DigiKey
R9 R12 R13: library part RNCS0805BKE1K00, "RES 1K OHM 0.1% 1/10W 0805", Device Package="0805 (2012 Metric)", manufacturer="Stackpole Electronics Inc", Operating Temperature="-55°C ~ 155°C", Power (Watts)="0.1W, 1/10W", Ratings=AEC-Q200, Supplier Device Package=0805, Supplier Part Number 1=RNCS0805BKE1K00CT-ND, Temperature Coefficient=±25ppm/°C, Tolerance=±0.1%, componentlink1description=Datasheet, componentlink1url=https://www.seielect.com/catalog/sei-rncs_rnch.pdf, componentlink2description="DigiKey Link", componentlink2url=https://www.digikey.com/en/products/detail/stackpole-electronics-inc/RNCS0805BKE1K00/1800073, Composition="Thin Film", Features="Anti-Corrosive, Automotive AEC-Q200, Moisture Resistant", Height - Seated (Max)="0.026\" (0.65mm)", lastupdated="21/03/2023 7:44:30 PM", Lifecycle Status=Active, Minimum Order=1, Number of Terminations=2, Package / Case="0805 (2012 Metric)", packaging=TapeAndReel, Part Number=RNCS0805BKE1K00, Part Status=Active, partid=27715, price=0.09, Resistance=1k, series=RNCS, Size / Dimension="0.079\" L x 0.049\" W (2.00mm x 1.25mm)", Supplier 1=DigiKey
U1: library part CMP-014-00003-4, "MAX31865 Series 3.3 V RTD-to-Digital Converter - SSOP-20"
U2: library part CMP-015-00015-1, "LIN Transceiver with Integrated Vreg 20kBd Automotive 8-Pin SOIC N Tube"
Y1: library part NX2520SA-16MHZ-EXS00A-CS05116, "CRYSTAL 16.0000MHZ 12PF SMD", ESR (Equivalent Series Resistance)="80 Ohms", Frequency Stability=±15ppm, Load Capacitance=12pF, manufacturer="NDK America, Inc.", Operating Mode=Fundamental, Operating Temperature="-10°C ~ 75°C", Package / Case="4-SMD, No Lead", Supplier Part Number 1=644-1200-1-ND, componentlink1description=Datasheet, componentlink1url=//media.digikey.com/pdf/Data%20Sheets/NDK%20PDFs/NX2520SA-16MHZ-EXS00A-CS05116.pdf, componentlink2description="DigiKey Link", componentlink2url=https://www.digikey.com/en/products/detail/ndk-america-inc/NX2520SA-16MHZ-EXS00A-CS05116/3894065, Frequency="16 MHz", Frequency Tolerance=±15ppm, Height - Seated (Max)="0.022\" (0.55mm)", lastupdated="21/03/2023 8:01:10 PM", Lifecycle Status=Active, Minimum Order=1, Mounting Type="Surface Mount", packaging=TapeAndReel, Part Number=NX2520SA-16MHZ-EXS00A-CS05116, Part Status=Active, partid=522, price=0.77, series=NX2520SA, Size / Dimension="0.098\" L x 0.079\" W (2.50mm x 2.00mm)", Supplier 1=DigiKey, Type="MHz Crystal"

## Free pads (board coordinates)
  round 6 hole 3.3: 1(65,3.6)
  round 6 hole 3.5: 1(65,43)

## Via types
v1: diameter 0.8, hole 0.35, Sig to GND, 55 vias

## Nets (pads, with @x,y where several pads share a name; then routed paths per layer and width w, separated by ;. In a path a pad name is that pad's centre, name@x,y a point inside that pad or via, vN(x,y) a via of type N, cw(c..) or ccw(c..) an arc to the next point about the centre after c; other vN are vias at no path point)
+3V3: C1.2 C2.2 C8.2 C9.2 C14.2 IC1.2 IC1.4 IC3.6 J4.3 R3.2 R6.2 U1.2 U1.3 | length 128.1
  Sig w0.254: U1.3 35.2,18.3 33.5,20 34.25,20 35.3,18.95 U1.2
  Sig w0.508: IC3.6 17.905,33.555 18.8,34.45 C14.2 19.196,34.896 19.196,35.446 20,36.25 24.75,36.25 v1(27.5,39) 27.5,32.25 29.5,30.25 v1(31,30.25) ; v1(29.75,44.25) 52.75,44.25 53.5,43.5 53.5,38.282 51.968,36.75 50.25,36.75 ; R6.2 31.553,25 31.303,24.75 v1(31.25,24.75) 31.25,24.671 31.95,23.971 C9.2 31.875,22.175 31.875,20.075 C8.2 33.5,20 ; J4.3 44.62,40.428 44.918,40.13 47.492,40.13 50.25,37.372 50.25,36.75 ; v1(50.25,28) 50.25,36.75 ; v1(52.25,28) 54.25,28 55.1,27.15 C2.2 ; C1.2 C2.2 ; IC1.2 IC1.4 ; R3.2 60.75,26.1 IC1.4 ; C2.2 56.3,25 57.65,26.35 IC1.4
  GND w0.508: v1(27.5,39) 29.75,41.25 v1(29.75,44.25) ; 31,25.079 v1(31,30.25) ; v1(50.25,28) v1(52.25,28)
+5V: C5.2 C6.2 C12.2 C13.2 D4.1 IC2.2 IC2.4 IC3.14 IC3.20 J4.5 R7.2 R12.2 R13.2 | length 204.5
  Sig w0.254: R13.2 17.625,11.375 18.5,12.25 v1(20.5,12.25) ; R12.2 23.75,7.625 23.75,12 v1(24.75,13) ; v1(27.5,15.75) 27.5,21.85 D4.1
  Sig w0.508: v1(6.246,24.996) 5.25,24 5.25,2.25 6,1.5 51.5,1.5 55.1,5.1 C5.2 55.1,13.4 49.342,19.158 49.342,37.192 47.284,39.25 43.25,39.25 42,40.5 39.838,40.5 39.54,40.798 J4.5 ; C12.2 7.745,34.255 IC3.14 7.745,30.255 ; v1(8.5,27.5) 7.745,28.255 7.745,30.255 ; v1(20.5,12.25) 18.635,14.115 15.101,14.115 12.75,16.466 12.75,18.6 12.1,19.25 C13.2 12.3,19.5 13,19.5 14.095,20.595 IC3.20 14.095,24.702 13.797,25 13,25 7.745,30.255 ; C6.2 56.952,11 57.25,11.298 57.25,12.202 57.548,12.5 IC2.4 ; IC2.2 IC2.4 ; R7.2 60.625,12.375 IC2.4
  GND w0.254: v1(20.5,12.25) 24,12.25 v1(24.75,13) v1(27.5,15.75)
  GND w0.508: v1(6.246,24.996) 6.302,25.052 6.302,25.302 v1(8.5,27.5)
+12V: C3.2 C7.2 C10.2 C11.2 D3.1 FB1.1 IC1.3 IC2.3 R10.2 U2.7 | length 83.3
  Sig w0.254: C11.2 41.5,30.7 41.8,31 v1(47.75,31) 47.75,33.875 R10.2
  Sig w0.508: D3.1 35.015,33.365 U2.7 37.834,33.331 38.902,33.331 39.2,33.033 39.2,29.7 C10.2 C11.2 ; v1(52.55,32.8) C3.2 ; IC2.3 C7.2 52.3,18.8 51.2,19.9 51.2,35.3 51.65,35.75 60.95,35.75 62,36.8 FB1.1 63.402,38.5 63.7,38.202 63.7,36.3 62.5,35.1 55.6,35.1 55,34.5 C3.2 ; IC1.3 58.05,32.8 C3.2
  GND w0.254: v1(47.75,31) 49.55,32.8 v1(52.55,32.8)
+12Vin: F1.2 J4.1 | length 5.1
  Sig w0.508: J4.1 49.7,39 50.2,38.5 F1.2
AID3: IC3.9 J2.3 | length 12.6
  Sig w0.254: IC3.9 14.095,33.295 18.8,38 19.6,38.8 19.6,41.9 J2.3
AID7: IC3.13 J2.7 | length 10.5
  Sig w0.254: IC3.13 9.015,35.615 9.34,35.94 J2.7
AO: IC3.12 J2.6 | length 11
  Sig w0.254: IC3.12 10.285,36.285 11.88,37.88 J2.6
CCS: R10.1 U2.2 | length 3.3
  Sig w0.254: U2.2 44.651,33.365 44.8,33.514 44.8,33.751 44.949,33.9 46.025,33.9 R10.1
CS: IC3.5 R6.1 U1.16 | length 36.6
  Sig w0.254: IC3.5 19.175,31.075 19.937,30.313 19.937,28.361 21.467,26.831 34.351,26.831 34.5,26.682 34.5,25.018 35.663,25.018 36.181,24.5 v1(36.25,24.5) ; v1(40,23.9) 39.896,23.796 39.896,23.284 39.3,22.689 39.3,19 41.261,17.039 43.288,17.039 U1.16
  GND w0.254: v1(36.25,24.5) 36.363,24.5 36.963,23.9 v1(40,23.9)
D4LED: D4.2 R14.1 | length 2.4
  Sig w0.254: R14.1 29.375,25.875 D4.2
FOR2: R1.2 R2.1 U1.9 | length 15.1
  Sig w0.254: v1(29.3,12.3) 29.3,15.1 29.7,15.5 R1.2 31,17.625 R2.1 ; v1(31.9,12.2) 32.9,12.2 35.1,14.4 U1.9
  GND w0.254: v1(29.3,12.3) 29.35,12.25 31.85,12.25 v1(31.9,12.2)
FUB: F1.1 FB1.2 | length 3.4
  Sig w0.508: F1.1 FB1.2
GND: C1.1 C2.1 C3.1 C5.1 C6.1 C7.1 C8.1 C9.1 C10.1 C11.1 C12.1 C13.1 C14.1 C15.1 C16.1 D1.2 D2.2 IC1.1 IC2.1 IC3.15 IC3.21 J1.8 J2.8 J3.1 J3.8 J4.2 J4.4 J4.6 J4.8 R2.2 R11.1 U1.1 U1.13 U1.18 U1.19 U2.5 Y1.2 Y1.4 | length 49
  Sig w0.254: R2.2 29.375,19.125 30.2,19.95 C8.1 ; U1.1 v1(36.5,20.5) ; v1(41.25,15) 41.275,15.025 43.302,15.025 U1.13 ; v1(41.25,19.25) 41.398,19.25 41.698,18.95 U1.19 ; v1(41.275,18.275) 43.302,18.275 U1.18 ; v1(47.427,37.823) 47.495,37.755 47.495,36.88 R11.1
  Sig w0.508: v1(4.5,34.5) C12.1 ; v1(7.745,20.755) IC3.15 ; v1(10.5,18) C13.1@10.5,19.5 ; v1(14.5,16) C15.1 ; IC3.21 v1(15.365,24.365) ; Y1.4 16.593,18.993 16.593,20.02 v1(16.637,20.063) ; Y1.2 17.875,17.225 17.875,16.025 v1(17.9,16) ; v1(19.9,16) C16.1 ; C14.1 v1(21.9,34.5) ; C8.1 v1(30.2,21.45) ; C9.1 v1(35.25,22.25) ; v1(36,35.5) 36.027,35.5 36.432,35.905 U2.5 ; C10.1 40.25,27.9 ; v1(40.25,26.75) 40.25,27.9 ; C11.1 40.25,27.9 ; v1(53.4,31.2) C3.1 ; v1(53.5,6.8) C5.1 ; C6.1 v1(53.5,12.5) ; v1(53.5,17.25) 53.525,17.225 54.975,17.225 C7.1 ; v1(53.5,21) C1.1 ; C2.1 v1(53.5,26.5) ; IC2.1 v1(62.8,20.7) ; IC1.1 62.85,32.6 v1(64.8,32.6) ; D2.2 v1(65.5,15.75) ; D1.2 v1(66.9,28.5)
LEDg: IC3.28 R14.2 | length 4.3
  Sig w0.254: IC3.28 26.625,22.325 27,22.7 R14.2
LIN: J4.7 R9.1 U2.6 | length 14.1
  Sig w0.508: J4.7 34.46,39.34 34.9,38.9 34.9,37.025 R9.1 39.502,37 39.8,36.702 39.8,34.933 39.502,34.635 U2.6
MISO: IC3.3 U1.17 | length 36
  Sig w0.254: IC3.3 21.715,28.785 22.615,27.885 34.865,27.885 38.069,24.681 43.719,24.681 45.4,23 45.4,18.4 44.65,17.65 U1.17
MOSI: IC3.2 U1.14 | length 37.8
  Sig w0.254: IC3.2 22.985,28.615 23.207,28.393 35.107,28.393 38.3,25.2 43.918,25.2 45.908,23.21 45.908,16.608 45,15.7 U1.14
NetD1_1: D1.1 R3.1 | length 5.4
  Sig w0.254: R3.1 64.7,23.5 65.5,24.3 D1.1
NetD2_1: D2.1 R7.1 | length 5.8
  Sig w0.254: R7.1 65.1,9.5 65.5,9.9 D2.1
OP0NP: IC3.7 J2.1 | length 15.1
  Sig w0.254: IC3.7 16.635,34.224 21.811,39.4 24.4,39.4 24.58,39.58 J2.1
OP0OUT: IC3.8 J2.2 | length 13.1
  Sig w0.254: IC3.8 15.365,33.847 22.04,40.522 J2.2
OP1NP: IC3.10 J2.4 | length 12.1
  Sig w0.254: IC3.10 12.825,34.025 17,38.2 17,41.96 J2.4
OP1OUT: IC3.11 J2.5 | length 11.5
  Sig w0.254: IC3.11 11.555,35.155 14.42,38.02 J2.5
PWM4: IC3.26 J1.6 | length 40.2
  Sig w0.254: IC3.26 21.715,20.535 24.5,17.75 24.5,15.25 26.75,13 26.75,5.75 30.365,2.135 44.236,2.135 44.62,2.519 J1.6
PWM5: IC3.27 J1.5 | length 35.6
  Sig w0.254: IC3.27 22.985,20.515 25.25,18.25 25.25,15.5 27.258,13.492 27.258,6.742 31.357,2.643 41.893,2.643 42.08,2.83 J1.5
REF+: R4.2 U1.4 U1.5 | length 3.7
  Sig w0.254: R4.2 34.803,17.875 35.028,17.65 U1.4 U1.5
REF-: R4.1 U1.6 U1.7 | length 3.7
  Sig w0.254: R4.1 33.725,16.35 U1.6 U1.7
RSTN: IC3.18 J3.5 | length 19
  Sig w0.254: IC3.18 11.578,22.302 11.578,20.922 v1(11.6,20.9) ; v1(11.7,17.2) 11.7,8.1 14.317,5.483 14.317,4.643 J3.5
  GND w0.254: v1(11.6,20.9) 11.65,20.85 11.65,17.25 v1(11.7,17.2)
RTD+: C4.1 J1.2 R5.2 U1.10 | length 13.3
  Sig w0.254: J1.2 34.46,7.24 34.2,7.5 R5.2 32.875,9.125 33.7,9.95 C4.1 33.7,11.7 34.1,12.1 36,12.1 36.5,12.6 U1.10
RTD-: C4.2 J1.3 R8.2 U1.11 | length 16.9
  Sig w0.254: J1.3 36.844,4.656 36.844,5.656 36.4,6.1 36.4,7.4 R8.2 36.5,8.75 35.3,9.95 C4.2 41.4,10 43.327,11.927 U1.11
RTDS+: J1.1 R1.1 R5.1 U1.8 | length 15.7
  Sig w0.254: J1.1 31.7,4.72 31.7,6.1 31.207,6.593 31.207,7.418 R5.1 31,7.625 R1.1 32.45,13.75 33.75,15.05 U1.8
RTDS-: J1.4 R8.1 U1.12 | length 16.9
  Sig w0.254: J1.4 39.54,7.26 39.3,7.5 R8.1 38.25,8.851 38.399,9 42.1,9 44.6,11.5 44.6,14.002 44.241,14.361 43.367,14.361 U1.12
RXD: IC3.17 J3.6 U2.4 | length 89.9
  Sig w0.254: J3.6 11.92,5.78 9.469,8.231 9.469,20.358 10.279,21.168 10.279,22.319 IC3.17 10.285,23.965 5,29.25 3.149,29.25 2.969,29.43 2.969,41.219 6.008,44.258 27.492,44.258 28.492,43.258 28.492,40.476 28.968,40 v1(31.75,40) ; v1(36.5,39.75) 41.25,39.75 43.2,37.8 U2.4
  GND w0.254: v1(31.75,40) 36.102,40 36.352,39.75 v1(36.5,39.75)
SCK: IC3.4 U1.15 | length 33.6
  Sig w0.254: IC3.4 20.445,28.571 21.639,27.377 34.623,27.377 38.75,23.25 38.75,18.832 41.193,16.389 43.288,16.389 U1.15
SCL: IC3.25 J3.2 R12.1 | length 18
  Sig w0.254: IC3.25 20.445,21.055 22.125,19.375 R12.1@22.125,8 ; J3.2 22.08,7.455 R12.1
SDA: IC3.24 J3.3 R13.1 | length 21.4
  Sig w0.254: IC3.24 19.175,20.825 19.75,20.25 20.532,20.25 21.5,19.282 21.5,9.899 21.351,9.75 R13.1 19.54,9.585 J3.3
TXD: IC3.16 J3.7 U2.1 | length 89.9
  Sig w0.254: v1(3.75,27.75) 5.75,27.75 9.015,24.485 IC3.16 8.961,22.271 8.961,5.27 9.38,4.851 J3.7 ; v1(3.75,30.75) 3.719,30.781 3.719,41.219 6.25,43.75 27.25,43.75 27.984,43.016 27.984,40.266 29.25,39 v1(32.75,39) ; v1(36.5,38.5) 40.5,38.5 40.924,38.076 40.924,33.896 42.725,32.095 U2.1
  GND w0.254: v1(3.75,27.75) v1(3.75,30.75) ; v1(32.75,39) 34.199,39 34.449,39.25 35.75,39.25 v1(36.5,38.5)
UPDI: IC3.19 J3.4 | length 19.6
  Sig w0.254: v1(12.75,20.75) 12.788,20.787 12.788,22.287 IC3.19 ; v1(13.5,14) 13.5,9.2 17,5.7 J3.4
  GND w0.254: v1(12.75,20.75) 12.75,14.75 v1(13.5,14)
VBB: D3.2 R9.2 | length 4.1
  Sig w0.508: D3.2 32.05,34.65 33.125,35.725 R9.2
WAKE: R11.2 U2.3 | length 4.5
  Sig w0.254: U2.3 44.635,34.635 44.9,34.9 44.9,36.3 45.1,36.5 R11.2
XTAF1: C15.2 IC3.22 Y1.1 | length 7.4
  Sig w0.203: C15.2 15.6,18.9 ; Y1.1 15.819,17.25 15.6,17.469 15.6,18.9 ; IC3.22 16.614,22.304 16.614,21.214 15.6,20.2 15.6,18.9
XTAF2: C16.2 IC3.23 Y1.3 | length 5.5
  Sig w0.203: IC3.23 17.85,22.27 Y1.3 19.85,18.95 C16.2
ZCDO: IC3.1 J1.7 | length 46.4
  Sig w0.254: IC3.1 24.255,29.149 24.404,29 35.25,29 38.5,25.75 44.25,25.75 47.16,22.84 J1.7
pads on no net: U1.20 U2.8

## Polygon pours and split planes (outlines as drawn)
GND on GND "bottomGND" (solid, remove dead copper, pour order 0): 0.5,0.5 0.5,46 68,46 68,0.5
GND on Sig "topGND" (solid, remove dead copper, pour order 1): 0,0 0,46.5 68.5,46.5 68.5,0

## Silkscreen, mask and mechanical layers (free items; w line width, h text height)
Bottom Overlay:
  text "Connector J4  / PIN1 - +12Vin / PIN2 - GND / PIN3 - +3v3 / PIN4 - GND / PIN5 - +5V / PIN6 - GND / PIN7 - LIN / PIN8 - GND" at 50.6,39.7 h1.5 r90
  text "Connector J2  / PIN1 - OP0NP / PIN2 - OP0OUT / PIN3 - AID3 / PIN4 - OP1NP / PIN5 - OP1OUT / PIN6 - AO / PIN7 - AID7 / PIN8 - GND" at 16.6,39.3 h1.5 r90
  text "RTD Monitor IO /  / By vsubas  - v01" at 63,30.8 h1 r90
  text "Connector J3  / PIN1 - GND / PIN2 - SCL / PIN3 - SDA / PIN4 - UPUI / PIN5 - RSTN / PIN6 - RXD / PIN7 - TXD / PIN8 - GND" at 16.9,14.6 h1.5 r90
  text "Connector J1  / PIN1 - RTDS+ / PIN2 - RTDS+ / PIN3 - RTDS- / PIN4 - RTDS- / PIN5 - PWM5 / PIN6 - PWM4 / PIN7 - ZCDO / PIN8 - GND" at 50.6,14.6 h1.5 r90
boardOutline:
  the board outline again, w0.254

## Dimensions
0,0 to 68.5,0 on boardOutline
0,0 to 0,46.5 on boardOutline